# EAGLE board intelligent half bridge R1 with heatsink (EAGLE 5.10)
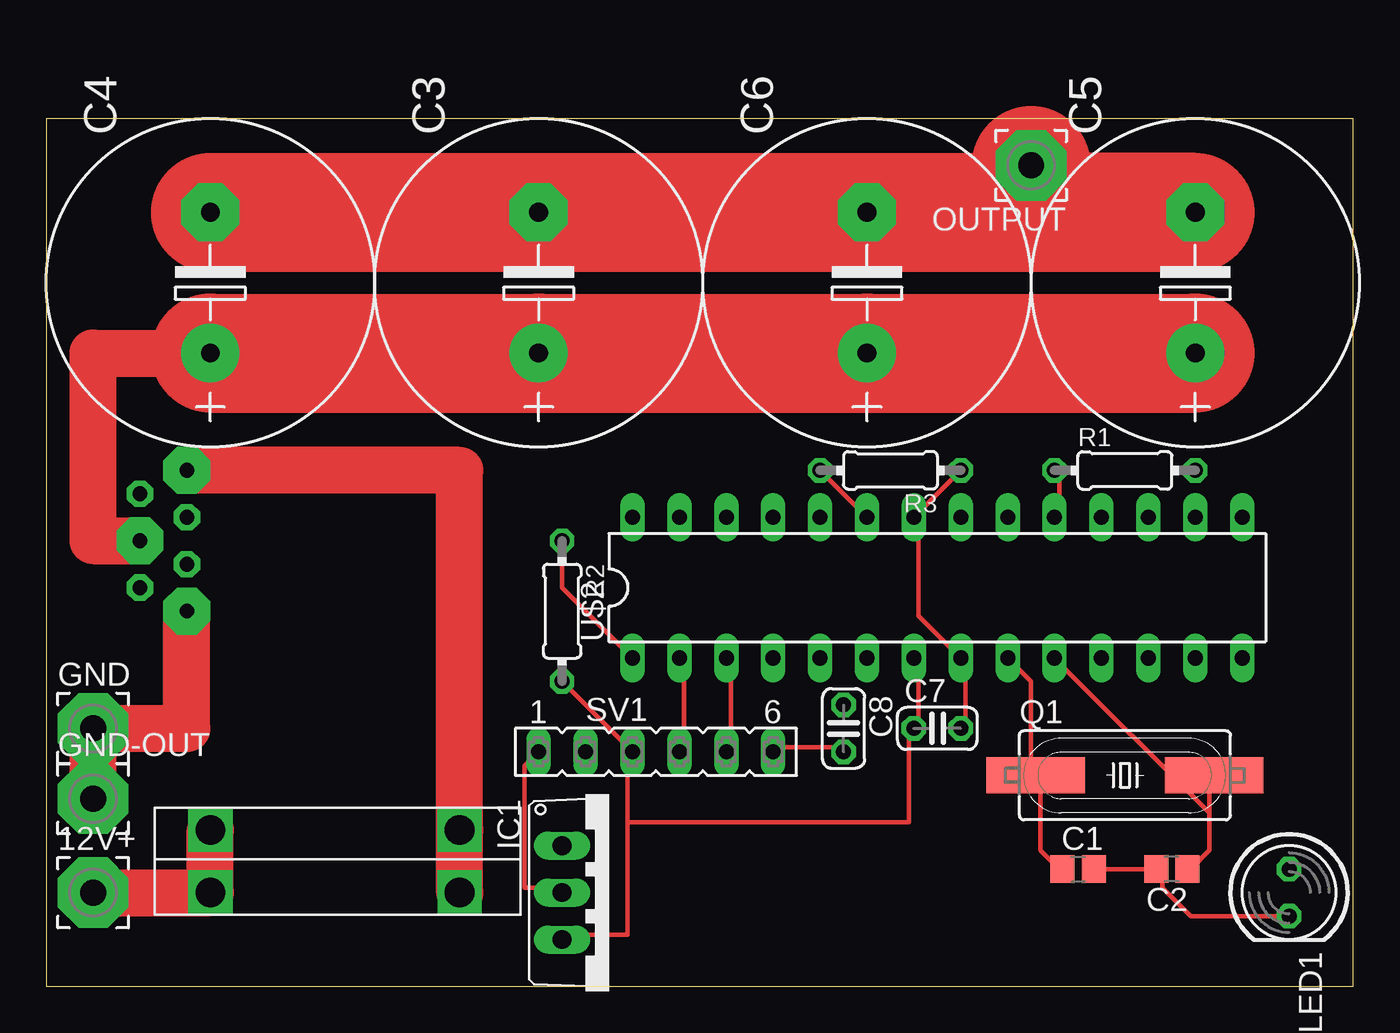
[diagram p0: board, top side]
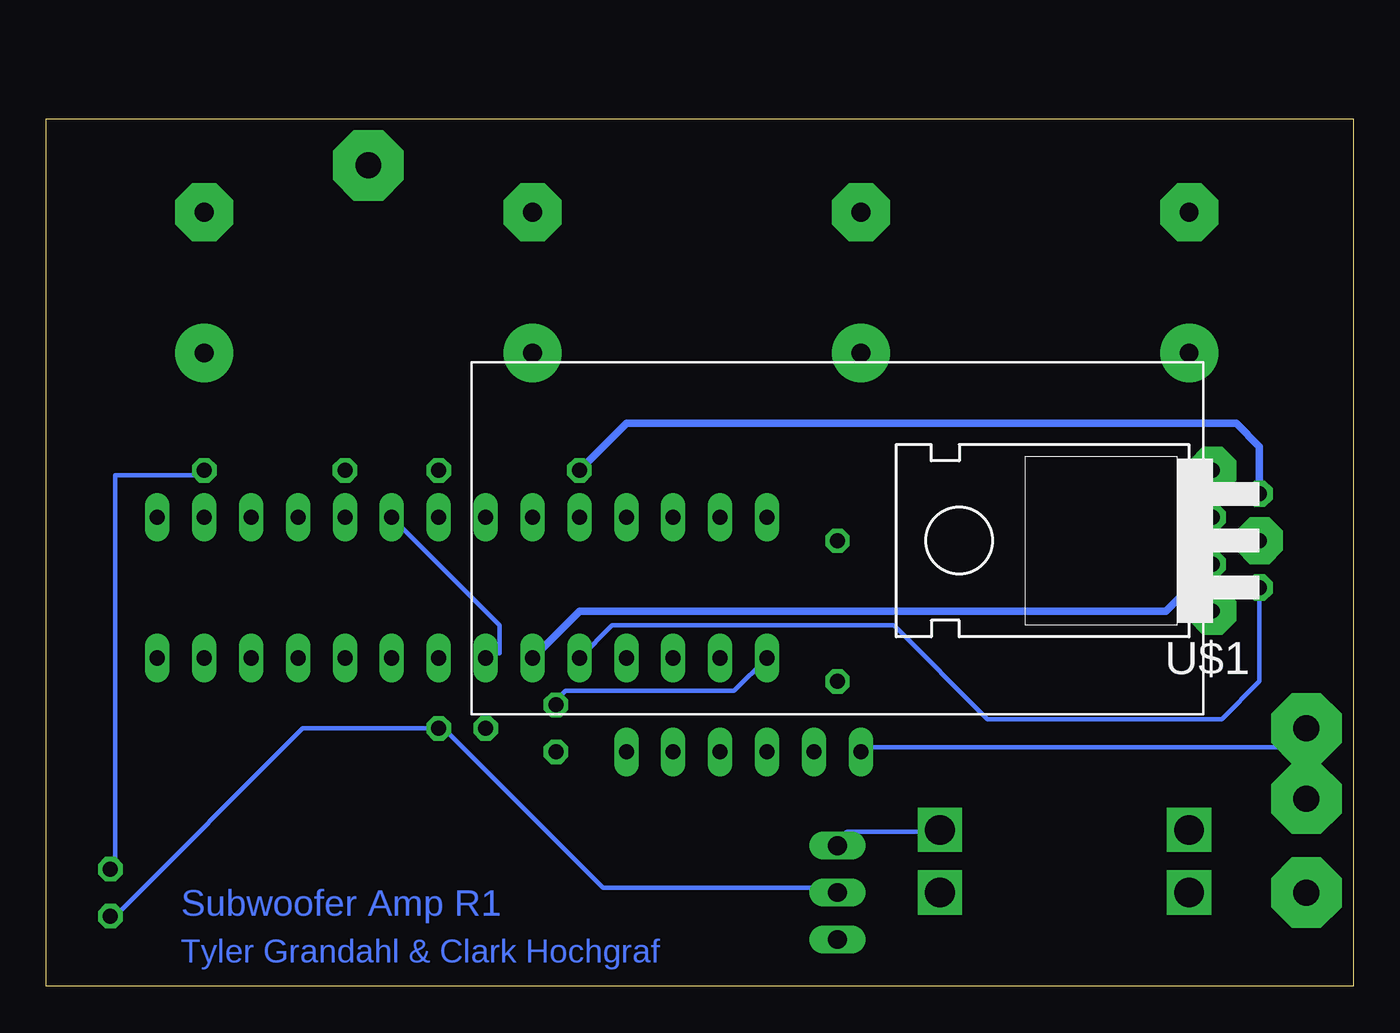
[diagram p1: board, bottom side, seen from below]

Size 70.79 x 46.98 mm. Coordinates in mm from the lower left corner, seen from the top.
Outline: 0,0 70.79,0 70.79,46.98 0,46.98 0,0
Copper layers (1*16): Top 0.035mm / dielectric 1.5mm / Bottom 0.035mm
Design rules "default": minimum track width 10mil, minimum drill 24mil, track to track 8mil, track to pad 8mil, pad to pad 8mil, via to via 8mil, smd to smd 8mil, copper to edge 40mil, drill to drill 8mil, minimum pad ring 10mil, minimum via ring 8mil, stop-mask expansion 4mil, vias tented up to drill 0mil, thermal gap 10mil

## Footprints (pad centres in the part's own frame; a part is rotated, then mirrored left to right if it is on the bottom)
3,81/1,4 = drill 1.397 pad 3.81 octagon: 1 0,0
C0805 = smd 1.3 x 1.5: 1 -0.85,0; 2 0.85,0
E7,5-18 = drill 1.016 pad 3.15 round: + -3.81,0 | drill 1.016 pad 3.15 octagon: - 3.81,0
C025-024X044 = drill 0.813 octagon: 1 -1.27,0; 2 1.27,0
2IN1_FUSEHOLDER = drill 1.6 square: 1 0,0; 2 0,3.4; 3 13.5,3.4; 4 13.5,0
TO220V = drill 1.016 long: 1 -2.54,-2.54; 2 0,-2.54; 3 2.54,-2.54
LED5MM = drill 0.813 octagon: A -1.27,0; K 1.27,0
HC49UP = smd 5.334 x 1.93: 1 -4.826,0; 2 4.826,0
0204/7 = drill 0.813 octagon: 1 -3.81,0; 2 3.81,0
FE06 = drill 0.813 long: 1 -6.35,0; 2 -3.81,0; 3 -1.27,0; 4 1.27,0; 5 3.81,0; 6 6.35,0
TO220-7-HS = drill 0.8 pad 2.54 octagon: 1 -3.81,-13.97; 4 0,-16.51; 7 3.81,-13.97 | drill 0.8 pad 1.422 octagon: 2 -2.54,-16.51; 3 -1.27,-13.97; 5 1.27,-13.97; 6 2.54,-16.51
DIL28-3 = drill 0.813 long: 1 -16.51,-3.81; 2 -13.97,-3.81; 3 -11.43,-3.81; 4 -8.89,-3.81; 5 -6.35,-3.81; 6 -3.81,-3.81; 7 -1.27,-3.81; 8 1.27,-3.81; 9 3.81,-3.81; 10 6.35,-3.81; 11 8.89,-3.81; 12 11.43,-3.81; 13 13.97,-3.81; 14 16.51,-3.81; 15 16.51,3.81; 16 13.97,3.81; 17 11.43,3.81; 18 8.89,3.81; 19 6.35,3.81; 20 3.81,3.81; 21 1.27,3.81; 22 -1.27,3.81; 23 -3.81,3.81; 24 -6.35,3.81; 25 -8.89,3.81; 26 -11.43,3.81; 27 -13.97,3.81; 28 -16.51,3.81

## Placement (x,y rotation side)
12V+  [3,81/1,4]  2.54,5.08 0 top
C1  22pF  [C0805]  55.88,6.35 0 top
C2  22pF  [C0805]  60.96,6.35 180 top
C3  [E7,5-18]  26.67,38.1 90 top
C4  [E7,5-18]  8.89,38.1 90 top
C5  [E7,5-18]  62.23,38.1 90 top
C6  [E7,5-18]  44.45,38.1 90 top
C7  0.1uF  [C025-024X044]  48.26,13.97 0 top
C8  0.1uF  [C025-024X044]  43.18,13.97 270 top
FUSE  2IN1FUSEHOLDER  [2IN1_FUSEHOLDER]  8.89,5.08 0 top
GND  [3,81/1,4]  2.54,13.97 0 top
GND-OUT  [3,81/1,4]  2.54,10.16 0 top
IC1  7805TV  [TO220V]  30.48,5.08 270 top
LED1  [LED5MM]  67.31,5.08 270 top
OUTPUT  [3,81/1,4]  53.34,44.45 180 top
Q1  [HC49UP]  58.42,11.43 0 top
R1  470  [0204/7]  58.42,27.94 0 top
R2  10K  [0204/7]  27.94,20.32 270 top
R3  470  [0204/7]  45.72,27.94 180 top
SV1  [FE06]  33.02,12.7 0 top
U$1  BTN7930SHS  [TO220-7-HS]  21.59,24.13 90 bottom
U$2  ARDUINO-MEGA328P  [DIL28-3]  48.26,21.59 0 top

## Library data of the parts
12V+ GND GND-OUT OUTPUT = wirepad
C1 C2 = resistor
C3-C8 R1-R3 = rcl
FUSE U$1 U$2 = custom
IC1 = linear
LED1 = led
Q1 = crystal
SV1 = con-lsta

## Nets
+5V: C7.1 IC1.3 R2.2 SV1.3 U$2.7 U$2.20
GND: C1.2 C2.2 C7.2 GND-OUT.1 GND.1 IC1.2 LED1.K R3.1 SV1.1 U$1.1 U$2.8 U$2.22
N$1: R3.2 U$1.6 U$2.23
N$2: 12V+.1 FUSE.1 FUSE.2
N$3: C8.2 SV1.6
N$4: C8.1 R2.1 U$2.1
N$5: FUSE.3 FUSE.4 IC1.1 U$1.7
N$6: C2.1 Q1.2 U$2.10
N$7: C1.1 Q1.1 U$2.9
N$8: U$1.3 U$2.6
N$9: R1.1 U$2.19
N$10: LED1.A R1.2
N$11: C3.+ C4.+ C5.+ C6.+ U$1.4
N$12: C3.- C4.- C5.- C6.- OUTPUT.1
N$13: U$1.2 U$2.5
N$14: SV1.4 U$2.2
N$15: SV1.5 U$2.3

## Tracks (layer width: path | path; a pad name or v marks a point on that pad's centre or on a via)
+5V
  Top 0.254: R2.2 SV1.3 31.5,12.45 31.5,8.89 | U$2.7 47.24,17.53 47.24,13.97 C7.1 46.74,13.97 46.74,8.89 31.5,8.89 | 31.5,8.89 31.5,2.79 27.94,2.79 IC1.3
  Bottom 0.254: U$2.20 46.23,19.56 46.23,18.03 46.74,18.03 U$2.7
GND
  Top 0.254: C1.2 C2.2 60.45,6.35 60.45,5.33 61.98,3.81 LED1.K | R3.1 U$2.22 47.24,25.15 47.24,20.07 U$2.8 49.78,17.53 49.78,13.97 C7.2 | IC1.2 27.94,5.33 25.91,5.33 25.91,11.94 SV1.1
  Top 2.54: GND-OUT.1 GND.1 7.62,13.97 U$1.1
  Bottom 0.254: LED1.K 67.06,3.81 56.9,13.97 C7.2 49.28,13.97 40.64,5.33 27.94,5.33 IC1.2 | GND.1 3.56,12.95 26.42,12.95 SV1.1
N$1
  Top 0.254: R3.2 U$2.23
  Bottom 0.406: U$1.6 5.08,29.21 6.35,30.48 39.37,30.48 R3.2
N$2
  Top 2.54: 12V+.1 FUSE.1 FUSE.2
N$3
  Top 0.254: SV1.6 39.62,12.95 43.18,12.95 C8.2
N$4
  Top 0.254: R2.1 27.94,21.59 U$2.1
  Bottom 0.254: C8.1 43.18,15.49 42.67,16 33.53,16 U$2.1
N$5
  Top 2.54: FUSE.4 FUSE.3 22.39,27.94 U$1.7
  Bottom 0.254: IC1.1 27.94,7.87 27.43,8.38 22.86,8.38 FUSE.3
N$6
  Top 0.254: 62.99,9.4 62.99,11.43 Q1.2 | 62.99,9.4 62.99,7.37 61.98,6.35 C2.1 | 62.99,9.4 U$2.10
N$7
  Top 0.254: C1.1 54.86,6.35 53.85,7.37 53.85,11.43 Q1.1 53.34,11.43 53.34,16.51 U$2.9
N$8
  Bottom 0.406: U$2.6 41.91,20.32 10.16,20.32 U$1.3
N$9
  Top 0.254: U$2.19 54.86,25.65 54.86,27.69 R1.1
N$10
  Bottom 0.254: LED1.A 67.06,6.35 67.06,27.69 62.48,27.69 R1.2
N$11
  Top 2.54: U$1.4 2.54,24.13 2.54,34.29 C4.+
  Top 6.452: C5.+ C6.+ C3.+ C4.+
N$12
  Top 6.452: C4.- C3.- C6.- C5.- 53.34,41.91 OUTPUT.1
N$13
  Bottom 0.254: U$2.5 40.13,19.56 24.89,19.56 19.81,14.48 7.11,14.48 5.08,16.51 U$1.2
N$14
  Top 0.254: SV1.4 34.54,12.95 34.54,17.53 U$2.2
N$15
  Top 0.254: SV1.5 37.08,12.95 37.08,17.53 U$2.3

## Text on the board
Bottom: Subwoofer Amp R1 | Tyler Grandahl & Clark Hochgraf